# EAGLE board ECA0406_PCB_Common_Base_Amplifier (EAGLE 9.6.2)
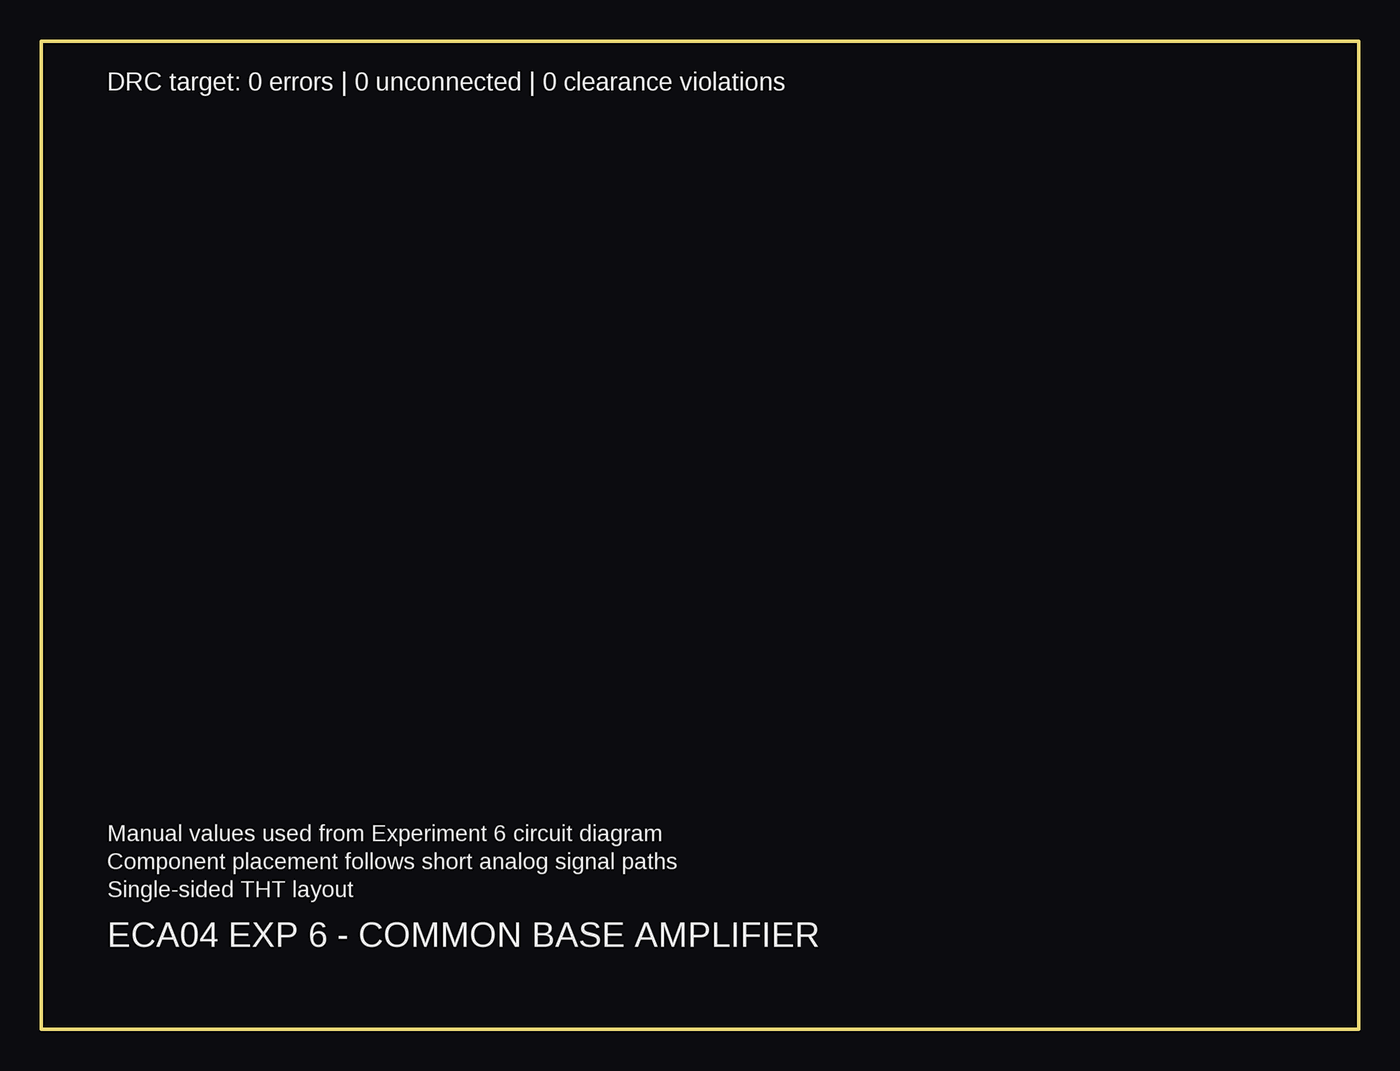
[diagram p0: board, top side]
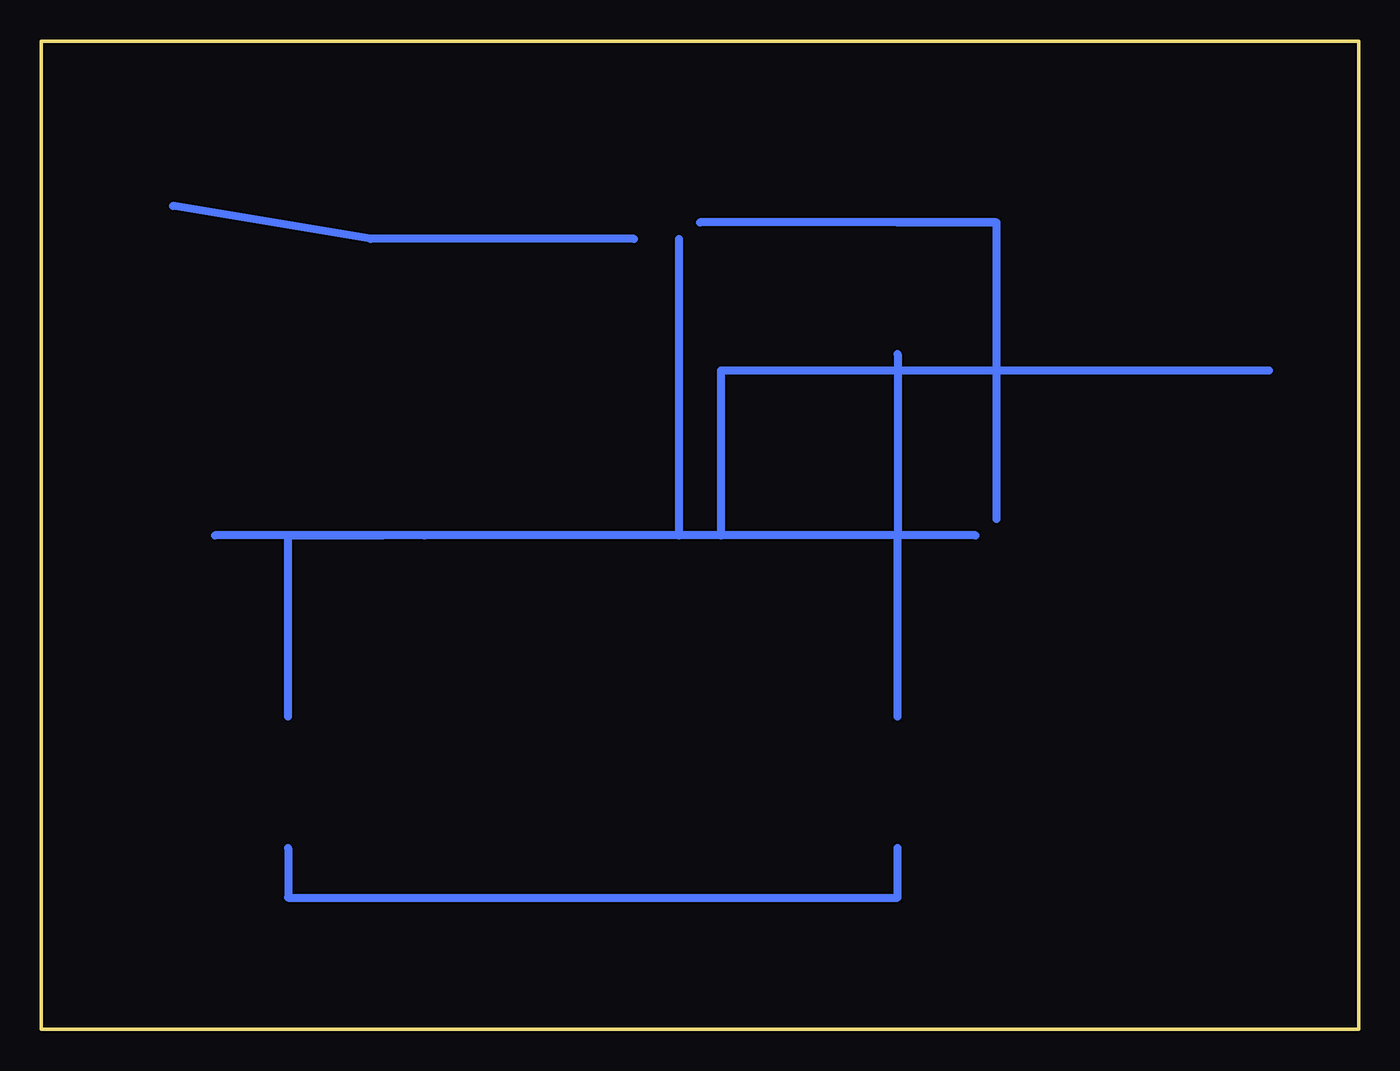
[diagram p1: board, bottom side, seen from below]

Size 80 x 60 mm. Coordinates in mm from the lower left corner, seen from the top.
Outline: 0,0 80,0 80,60 0,60 0,0
Copper layers (1*16): Top / Bottom
Design rules: minimum track width 20mil, minimum drill 36mil, track to track 6mil, track to pad 6mil, pad to pad 6mil, via to via 6mil

## Placement (x,y rotation side)
C1  1u  [C_THT]  22,30 90 top
C2  1u  [C_THT]  58,30 90 top
C3  1u  [C_THT]  15,40 0 top
J1  INPUT  [HDR2]  8,40 0 top
J2  OUTPUT  [HDR2]  72,30 0 top
J3  VCC/GND  [HDR2]  72,48 0 top
Q1  2N3904  [TO92]  40,30 0 top
R1  10k  [R_THT]  65,15 90 top
R2  100  [R_THT]  40,48 0 top
R3  68k  [R_THT]  28,15 90 top
R4  4.7k  [R_THT]  28,45 90 top

## Library data of the parts
C1-C3 J1-J3 Q1 R1-R4 = Custom

## Nets
BASE: C1.1 Q1.2 R3.2 R4.1
COLLECTOR: C2.1 Q1.1 R1.2
EMITTER: C3.2 Q1.3 R2.1
GND: C1.2 J3.2 R2.2 R4.2
INPUT: C3.1 J1.1
OUTPUT: C2.2 J2.1
VCC: J3.1 R1.1 R3.1

## Tracks (layer width: path | path; a pad name or v marks a point on that pad's centre or on a via)
BASE
  Bottom 0.5: 28,19 28,30 | 28,30 38.73,30 | 28,41 28,30 | 23.27,30 28,30
COLLECTOR
  Bottom 0.5: 38.73,30 65,30 | 65,19 65,30 | 65,30 59.27,30
EMITTER
  Bottom 0.5: 41.27,30 41.27,48 | 15,40 38.73,40 38.73,30
GND
  Bottom 0.5: 44,48 60,48 72,50 | 28,49 22,49 | 22,49 22,31 | 22,49 40,49
INPUT
  Bottom 0.5: 5.46,40 15,40
OUTPUT
  Bottom 0.5: 56.73,30 69.46,30
VCC
  Bottom 0.5: 65,11 65,8 28,8 28,11

## Text on the board
tPlace: DRC target: 0 errors | 0 unconnected | 0 clearance violations | Manual values used from Experiment 6 circuit diagram | Component placement follows short analog signal paths | Single-sided THT layout | ECA04 EXP 6 - COMMON BASE AMPLIFIER